# EAGLE board IRis - Master PCB Layout (EAGLE 8.7.0)
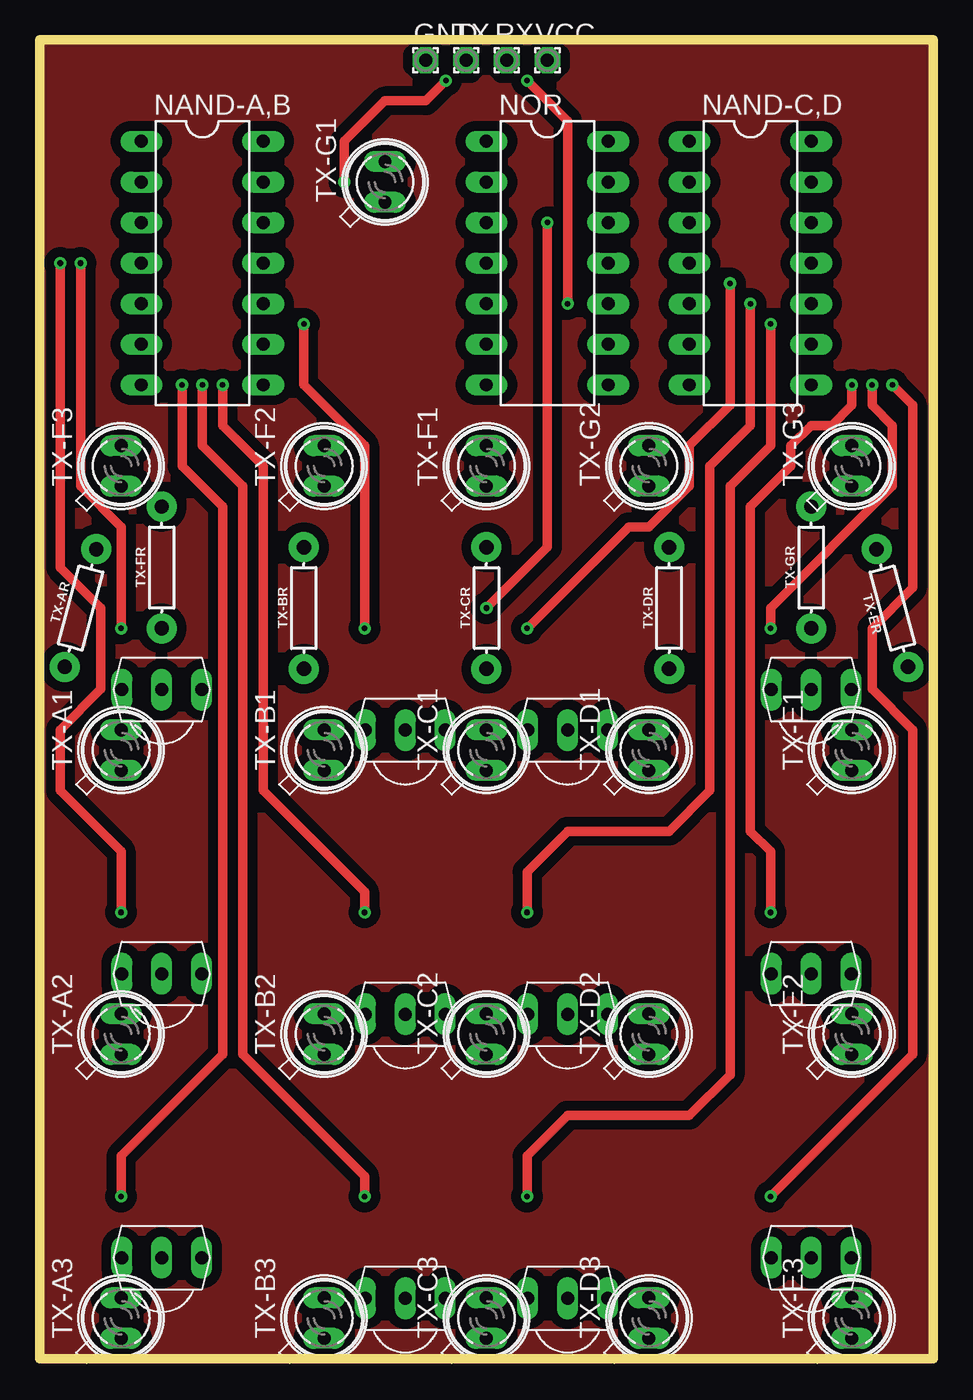
[diagram p0: board, top side]
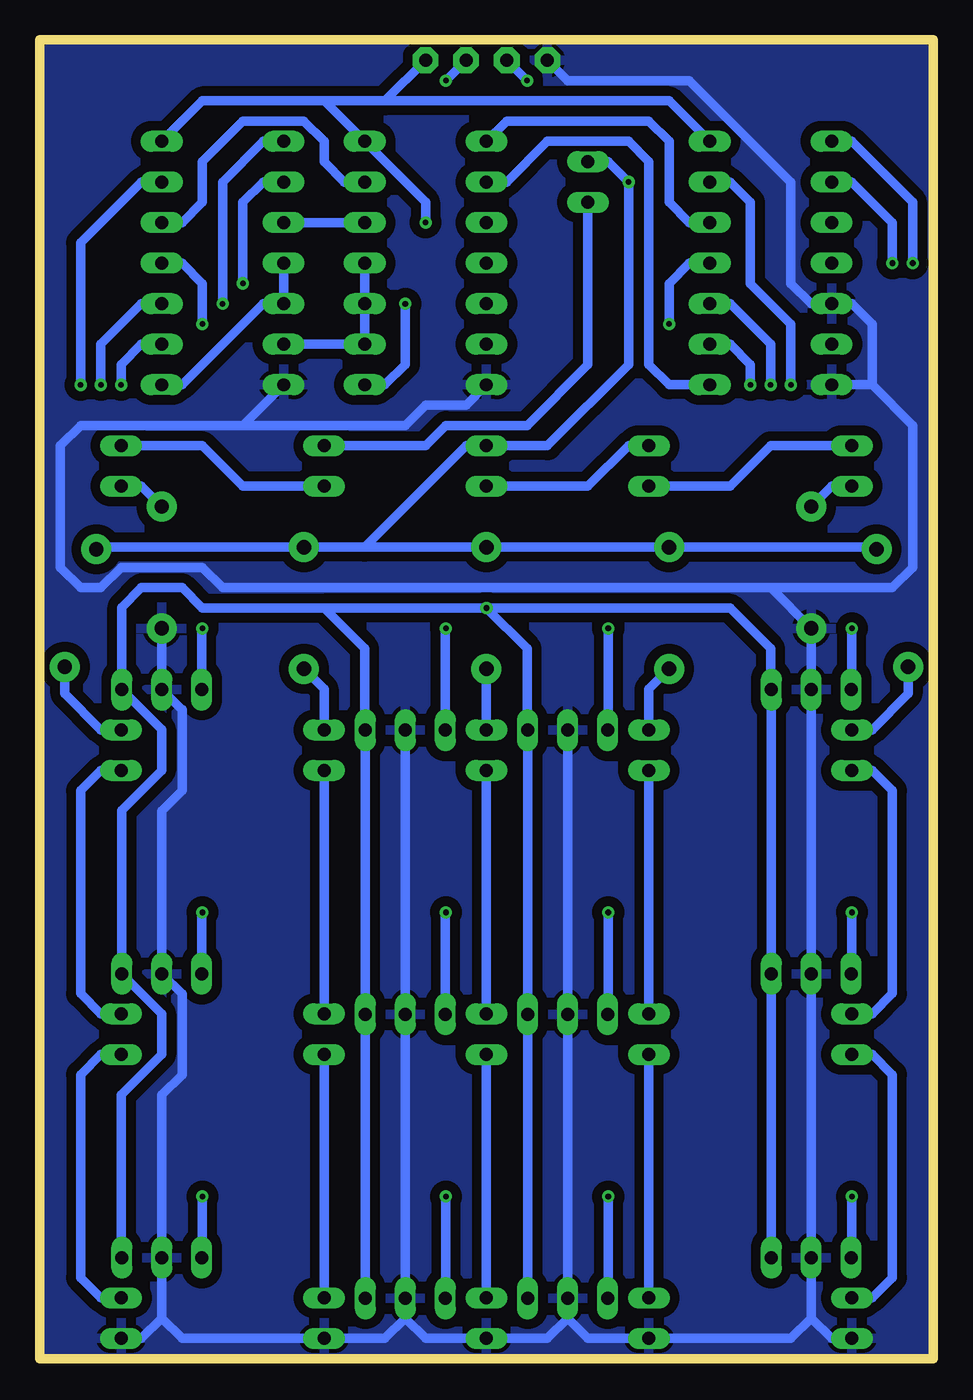
[diagram p1: board, bottom side, seen from below]

Size 55.88 x 82.55 mm. Coordinates in mm from the lower left corner, seen from the top.
Outline: 0,0 55.88,0 55.88,82.55 0,82.55 0,0
Copper layers (1*16): Top 0.035mm / dielectric 1.5mm / Bottom 0.035mm
Design rules "default *": minimum track width 6mil, minimum drill 0.35mm, track to track 6mil, track to pad 6mil, pad to pad 6mil, via to via 6mil, smd to smd 6mil, copper to edge 0mil, drill to drill 6mil, minimum pad ring 10mil, minimum via ring 8mil, stop-mask expansion 4mil, vias tented up to drill 0mil, thermal gap 10mil

## Footprints (pad centres in the part's own frame; a part is rotated, then mirrored left to right if it is on the bottom)
1,6/0,8 = drill 0.813 pad 1.6 octagon: 1 0,0
DIL14 = drill 0.813 long: 1 -7.62,-3.81; 2 -5.08,-3.81; 3 -2.54,-3.81; 4 0,-3.81; 5 2.54,-3.81; 6 5.08,-3.81; 7 7.62,-3.81; 8 7.62,3.81; 9 5.08,3.81; 10 2.54,3.81; 11 0,3.81; 12 -2.54,3.81; 13 -5.08,3.81; 14 -7.62,3.81
TSOP18XX = drill 0.813 long: GND -0.001,-0.027; OUT -2.501,-0.027; VCC 2.499,-0.027
SFH480 = drill 0.813 long: A 1.27,0; K -1.27,0
AXIAL-0.3EZ = drill 0.9 pad 1.88: P$1 -3.81,0; P$2 3.81,0

## Placement (x,y rotation side)
GND  GND  [1,6/0,8]  24.13,81.28 0 top
NAND-A,B  7410  [DIL14]  10.16,68.58 270 top
NAND-C,D  7410  [DIL14]  44.45,68.58 270 top
NOR  7427  [DIL14]  31.75,68.58 270 top
RX  RX  [1,6/0,8]  29.21,81.28 0 top
RX-A1  VS1838B  [TSOP18XX]  7.62,41.91 0 top
RX-A2  VS1838B  [TSOP18XX]  7.62,24.13 0 top
RX-A3  VS1838B  [TSOP18XX]  7.62,6.35 0 top
RX-B1  VS1838B  [TSOP18XX]  22.86,39.37 0 top
RX-B2  VS1838B  [TSOP18XX]  22.86,21.59 0 top
RX-B3  VS1838B  [TSOP18XX]  22.86,3.81 0 top
RX-C1  VS1838B  [TSOP18XX]  33.02,39.37 0 top
RX-C2  VS1838B  [TSOP18XX]  33.02,21.59 0 top
RX-C3  VS1838B  [TSOP18XX]  33.02,3.81 0 top
RX-D1  [TSOP18XX]  48.26,41.91 0 top
RX-D2  [TSOP18XX]  48.26,24.13 0 top
RX-D3  [TSOP18XX]  48.26,6.35 0 top
TX  TX  [1,6/0,8]  26.67,81.28 0 top
TX-A1  IR LED  [SFH480]  5.08,38.1 90 top
TX-A2  [SFH480]  5.08,20.32 90 top
TX-A3  [SFH480]  5.08,2.54 90 top
TX-AR  [AXIAL-0.3EZ]  2.54,46.99 75 top
TX-B1  [SFH480]  17.78,38.1 90 top
TX-B2  [SFH480]  17.78,20.32 90 top
TX-B3  [SFH480]  17.78,2.54 90 top
TX-BR  [AXIAL-0.3EZ]  16.51,46.99 90 top
TX-C1  [SFH480]  27.94,38.1 90 top
TX-C2  [SFH480]  27.94,20.32 90 top
TX-C3  [SFH480]  27.94,2.54 90 top
TX-CR  [AXIAL-0.3EZ]  27.94,46.99 90 top
TX-D1  [SFH480]  38.1,38.1 90 top
TX-D2  [SFH480]  38.1,20.32 90 top
TX-D3  [SFH480]  38.1,2.54 90 top
TX-DR  [AXIAL-0.3EZ]  39.37,46.99 90 top
TX-E1  [SFH480]  50.8,38.1 90 top
TX-E2  [SFH480]  50.8,20.32 90 top
TX-E3  [SFH480]  50.8,2.54 90 top
TX-ER  [AXIAL-0.3EZ]  53.34,46.99 105 top
TX-F1  [SFH480]  27.94,55.88 90 top
TX-F2  [SFH480]  17.78,55.88 90 top
TX-F3  [SFH480]  5.08,55.88 90 top
TX-FR  [AXIAL-0.3EZ]  7.62,49.53 90 top
TX-G1  [SFH480]  21.59,73.66 90 top
TX-G2  [SFH480]  38.1,55.88 90 top
TX-G3  [SFH480]  50.8,55.88 90 top
TX-GR  [AXIAL-0.3EZ]  48.26,49.53 90 top
VCC  VCC  [1,6/0,8]  31.75,81.28 0 top

## Library data of the parts
GND RX TX VCC = wirepad
NAND-A,B NAND-C,D NOR = 40xx
RX-A1-RX-A3 RX-B1-RX-B3 RX-C1-RX-C3 RX-D1-RX-D3 = tsop
TX-A1-TX-A3 TX-B1-TX-B3 TX-C1-TX-C3 TX-D1-TX-D3 TX-E1-TX-E3 TX-F1-TX-F3 TX-G1-TX-G3 = led
TX-AR TX-BR TX-CR TX-DR TX-ER TX-FR TX-GR = SparkFun-Resistors

## Nets
GND: GND.1 NAND-A,B.5 NAND-A,B.7 NAND-C,D.7 NOR.7 RX-A1.GND RX-A2.GND RX-A3.GND RX-B1.GND RX-B2.GND RX-B3.GND RX-C1.GND RX-C2.GND RX-C3.GND RX-D1.GND RX-D2.GND RX-D3.GND TX-A3.K TX-B3.K TX-C3.K TX-D3.K TX-E3.K TX-FR.P$1 TX-GR.P$1
RX: NOR.8 RX.1
S$23: NAND-C,D.4 NAND-C,D.5 NAND-C,D.8
S$25: NAND-C,D.1 RX-C2.OUT
S$26: NAND-C,D.11 RX-C3.OUT
S$27: NAND-C,D.9 RX-D2.OUT
S$29: NAND-C,D.2 RX-C1.OUT
S$32: NAND-C,D.12 NOR.13
S$33: NAND-C,D.3 NOR.12
S$34: NAND-C,D.6 NOR.9 NOR.10 NOR.11
S$35: NAND-A,B.12 NOR.1
S$36: NAND-A,B.8 NOR.2
S$37: NAND-A,B.2 RX-A1.OUT
S$38: NAND-A,B.1 RX-A2.OUT
S$39: NAND-A,B.13 RX-A3.OUT
S$40: NAND-A,B.11 RX-B1.OUT
S$41: NAND-A,B.9 RX-B2.OUT
S$42: NAND-A,B.10 RX-B3.OUT
S$43: NAND-C,D.10 RX-D1.OUT
S$44: NAND-C,D.13 RX-D3.OUT
TX: TX-AR.P$2 TX-BR.P$2 TX-CR.P$2 TX-DR.P$2 TX-ER.P$2 TX-F1.A TX-G1.A TX.1
TX-A1,A2: TX-A1.K TX-A2.A
TX-A2,A3: TX-A2.K TX-A3.A
TX-AR,A1: TX-A1.A TX-AR.P$1
TX-B1,B2: TX-B1.K TX-B2.A
TX-B2,B3: TX-B2.K TX-B3.A
TX-BR,B1: TX-B1.A TX-BR.P$1
TX-C1,C2: TX-C1.K TX-C2.A
TX-C2,C3: TX-C2.K TX-C3.A
TX-CR,C1: TX-C1.A TX-CR.P$1
TX-D1,D2: TX-D1.K TX-D2.A
TX-D2,D3: TX-D2.K TX-D3.A
TX-DR,D1: TX-D1.A TX-DR.P$1
TX-E1,E2: TX-E1.K TX-E2.A
TX-E2,E3: TX-E2.K TX-E3.A
TX-ER,E1: TX-E1.A TX-ER.P$1
TX-F1,F2: TX-F1.K TX-F2.A
TX-F2,F3: TX-F2.K TX-F3.A
TX-F3,FR: TX-F3.K TX-FR.P$2
TX-G1,G2: TX-G1.K TX-G2.A
TX-G2,G3: TX-G2.K TX-G3.A
TX-G3,R: TX-G3.K TX-GR.P$2
VCC: NAND-A,B.14 NAND-C,D.14 NOR.14 RX-A1.VCC RX-A2.VCC RX-A3.VCC RX-B1.VCC RX-B2.VCC RX-B3.VCC RX-C1.VCC RX-C2.VCC RX-C3.VCC RX-D1.VCC RX-D2.VCC RX-D3.VCC VCC.1

## Tracks (layer width: path | path; a pad name or v marks a point on that pad's centre or on a via)
GND
  Bottom 0.61: 7.62,6.35 RX-A2.GND RX-A1.GND 7.62,43.18 TX-FR.P$1 10.16,48.26 | 7.62,6.35 RX-A3.GND | RX-B3.GND | TX-A3.K 6.35,1.27 7.62,2.54 | 7.62,2.54 7.62,6.35 | 7.62,2.54 8.89,1.27 TX-B3.K 21.59,1.27 22.86,2.54 | RX-B3.GND 22.86,2.54 | 22.86,2.54 24.13,1.27 TX-C3.K 31.75,1.27 33.02,2.54 RX-C3.GND | RX-C3.GND 33.02,2.54 34.29,1.27 TX-D3.K 46.99,1.27 48.26,2.54 | 48.26,2.54 RX-D3.GND 48.26,16.51 46.99,17.78 46.99,22.84 RX-D2.GND 48.26,34.29 46.99,35.56 46.99,40.64 47.02,40.64 RX-D1.GND 48.26,44.45 TX-GR.P$1 | 48.26,2.54 49.53,1.27 TX-E3.K | NAND-A,B.7 3.81,60.96 | 3.81,60.96 1.27,58.42 1.27,49.53 2.54,48.26 10.16,48.26 | 3.81,60.96 3.81,64.77 5.08,66.04 NAND-A,B.5 7.62,66.04 8.89,67.31 8.89,73.66 15.24,80.01 22.86,80.01 GND.1 | RX-C1.GND RX-C2.GND RX-C3.GND | RX-B1.GND RX-B2.GND RX-B3.GND | 43.18,58.42 53.34,58.42 54.61,57.15 54.61,49.53 53.34,48.26 52.07,48.26 50.8,49.53 45.72,49.53 44.45,48.26 10.16,48.26 | NAND-C,D.7 43.18,58.42 | 43.18,58.42 33.02,58.42 31.75,59.69 29.21,59.69 NOR.7
  pour Bottom (isolate 0.61): 0,0 55.88,0 55.88,81.28 55.88,82.55 7.62,82.55 0,82.55
RX  (via drill 0.35)
  Top 0.61: v30.48,80.01 33.02,77.47 v33.02,66.04
  Bottom 0.61: RX.1 v30.48,80.01 | v33.02,66.04 33.02,62.23 34.29,60.96 NOR.8
S$1
  pour Top (isolate 0.61): 0,0 55.88,0 55.88,82.55 0,82.55
S$23
  Bottom 0.61: NAND-C,D.8 46.99,60.96 41.91,66.04 NAND-C,D.5 NAND-C,D.4
S$25  (via drill 0.35)
  Top 0.61: v30.48,27.94 30.48,30.48 33.02,33.02 39.37,33.02 41.91,35.56 41.91,55.88 44.45,58.42 v44.45,66.04
  Bottom 0.61: NAND-C,D.1 41.91,76.2 44.45,73.66 v44.45,66.04 | v30.48,27.94 30.52,27.9 RX-C2.OUT
S$26  (via drill 0.35)
  Top 0.61: v30.48,10.16 30.48,12.7 33.02,15.24 40.64,15.24 43.18,17.78 43.18,54.61 45.72,57.15 v45.72,64.77
  Bottom 0.61: NAND-C,D.11 46.99,68.58 45.72,67.31 v45.72,64.77 | v30.48,10.16 30.48,3.82 RX-C3.OUT
S$27  (via drill 0.35)
  Top 0.61: v50.8,60.96 50.8,59.69 49.53,58.42 48.26,58.42 46.99,57.15 46.99,55.88 44.45,53.34 44.45,33.02 45.72,31.75 v45.72,27.94
  Bottom 0.61: NAND-C,D.9 49.53,63.5 50.8,62.23 v50.8,60.96 | RX-D2.OUT 45.76,27.9 v45.72,27.94
S$29  (via drill 0.35)
  Top 0.61: v43.18,67.31 43.18,59.69 40.64,57.15 40.64,54.61 38.1,52.07 36.83,52.07 v30.48,45.72
  Bottom 0.61: NAND-C,D.2 41.91,73.66 43.18,72.39 v43.18,67.31 | RX-C1.OUT 30.52,45.68 v30.48,45.72
S$32
  Bottom 0.61: NAND-C,D.12 46.99,71.12 45.72,72.39 45.72,74.93 43.18,77.47 39.37,77.47 38.1,76.2 38.1,74.93 36.83,73.66 NOR.13
S$33
  Bottom 0.61: NOR.12 NAND-C,D.3
S$34
  Bottom 0.61: NAND-C,D.6 NOR.9 NOR.10 NOR.11
S$35
  Bottom 0.61: NAND-A,B.12 15.24,71.12 16.51,72.39 16.51,76.2 17.78,77.47 26.67,77.47 NOR.1
S$36
  Bottom 0.61: NAND-A,B.8 16.51,60.96 17.78,62.23 17.78,74.93 19.05,76.2 24.13,76.2 26.67,73.66 NOR.2
S$37  (via drill 0.35)
  Top 0.61: v2.54,68.58 2.54,54.61 5.08,52.07 v5.08,45.72
  Bottom 0.61: v2.54,68.58 2.54,71.12 5.08,73.66 NAND-A,B.2 | RX-A1.OUT 5.08,41.92 v5.08,45.72
S$38  (via drill 0.35)
  Top 0.61: v5.08,27.94 5.08,31.75 1.27,35.56 1.27,39.37 3.81,41.91 3.81,46.99 1.27,49.53 v1.27,68.58
  Bottom 0.61: RX-A2.OUT 5.08,24.14 v5.08,27.94 | NAND-A,B.1 5.08,76.2 1.27,72.39 v1.27,68.58
S$39  (via drill 0.35)
  Top 0.61: v5.08,10.16 5.08,12.7 11.43,19.05 11.43,53.34 8.89,55.88 v8.89,60.96
  Bottom 0.61: RX-A3.OUT 5.08,6.36 v5.08,10.16 | NAND-A,B.13 12.7,73.66 11.43,72.39 11.43,67.31 8.89,64.77 v8.89,60.96
S$40  (via drill 0.35)
  Top 0.61: v16.51,64.77 16.51,60.96 20.32,57.15 v20.32,45.72
  Bottom 0.61: v16.51,64.77 16.51,67.31 15.24,68.58 NAND-A,B.11 | v20.32,45.72 20.32,39.38 RX-B1.OUT
S$41  (via drill 0.35)
  Top 0.61: v11.43,60.96 11.43,58.42 13.97,55.88 13.97,35.56 20.32,29.21 v20.32,27.94
  Bottom 0.61: NAND-A,B.9 12.7,63.5 11.43,62.23 v11.43,60.96 | v20.32,27.94 20.32,21.6 RX-B2.OUT
S$42  (via drill 0.35)
  Top 0.61: v10.16,60.96 10.16,57.15 12.7,54.61 12.7,19.05 20.32,11.43 v20.32,10.16
  Bottom 0.61: NAND-A,B.10 12.7,66.04 10.16,63.5 v10.16,60.96 | v20.32,10.16 20.32,3.82 RX-B3.OUT
S$43  (via drill 0.35)
  Top 0.61: v52.07,60.96 52.07,59.69 53.34,58.42 53.34,54.61 45.72,46.99 v45.72,45.72
  Bottom 0.61: v45.72,45.72 45.76,45.68 RX-D1.OUT | NAND-C,D.10 49.53,66.04 52.07,63.5 v52.07,60.96
S$44  (via drill 0.35)
  Top 0.61: v53.34,60.96 54.61,59.69 54.61,48.26 52.07,45.72 52.07,41.91 54.61,39.37 54.61,19.05 v45.72,10.16
  Bottom 0.61: v45.72,10.16 45.72,6.36 RX-D3.OUT | NAND-C,D.13 49.53,73.66 53.34,69.85 v53.34,60.96
TX  (via drill 0.35)
  Top 0.61: v25.4,80.01 24.13,78.74 21.59,78.74 19.05,76.2 v19.05,73.66
  Bottom 0.61: TX-DR.P$2 35.56,50.8 29.21,57.15 TX-F1.A 24.13,57.15 19.05,62.23 v19.05,73.66 20.32,74.93 TX-G1.A | TX-DR.P$2 TX-CR.P$2 TX-BR.P$2 3.81,50.8 3.68,50.67 TX-AR.P$2 | TX-DR.P$2 52.22,50.8 TX-ER.P$2 | TX.1 v25.4,80.01
TX-A1,A2
  Bottom 0.61: TX-A2.A 3.81,21.59 2.54,22.86 2.54,35.56 3.81,36.83 TX-A1.K
TX-A2,A3
  Bottom 0.61: TX-A2.K 3.81,19.05 2.54,17.78 2.54,5.08 3.81,3.81 TX-A3.A
TX-AR,A1
  Bottom 0.61: TX-AR.P$1 1.55,41.63 3.81,39.37 TX-A1.A
TX-B1,B2
  Bottom 0.61: TX-B1.K TX-B2.A
TX-B2,B3
  Bottom 0.61: TX-B2.K TX-B3.A
TX-BR,B1
  Bottom 0.61: TX-BR.P$1 17.78,41.91 TX-B1.A
TX-C1,C2
  Bottom 0.61: TX-C1.K TX-C2.A
TX-C2,C3
  Bottom 0.61: TX-C2.K TX-C3.A
TX-CR,C1
  Bottom 0.61: TX-CR.P$1 TX-C1.A
TX-D1,D2
  Bottom 0.61: TX-D1.K TX-D2.A
TX-D2,D3
  Bottom 0.61: TX-D2.K TX-D3.A
TX-DR,D1
  Bottom 0.61: TX-DR.P$1 38.1,41.91 TX-D1.A
TX-E1,E2
  Bottom 0.61: TX-E1.K 52.07,36.83 53.34,35.56 53.34,22.86 52.07,21.59 TX-E2.A
TX-E2,E3
  Bottom 0.61: TX-E2.K 52.07,19.05 53.34,17.78 53.34,5.08 52.07,3.81 TX-E3.A
TX-ER,E1
  Bottom 0.61: TX-E1.A 52.07,39.37 54.33,41.63 TX-ER.P$1
TX-F1,F2
  Bottom 0.61: TX-F1.K 21.59,54.61 19.05,57.15 TX-F2.A
TX-F2,F3
  Bottom 0.61: TX-F2.K 12.7,54.61 10.16,57.15 TX-F3.A
TX-F3,FR
  Bottom 0.61: TX-F3.K 6.35,54.61 TX-FR.P$2
TX-G1,G2
  Bottom 0.61: TX-G2.A 31.75,57.15 30.48,58.42 25.4,58.42 21.59,62.23 TX-G1.K
TX-G2,G3
  Bottom 0.61: TX-G2.K 43.18,54.61 45.72,57.15 TX-G3.A
TX-G3,R
  Bottom 0.61: TX-G3.K 49.53,54.61 TX-GR.P$2
VCC  (via drill 0.35)
  Top 0.61: v31.75,71.12 31.75,50.8 v27.94,46.99
  Bottom 0.61: RX-A3.VCC RX-A2.VCC RX-A1.VCC 10.16,41.92 10.16,44.45 12.7,46.99 v27.94,46.99 | RX-B3.VCC RX-B2.VCC RX-B1.VCC 25.4,39.38 25.4,44.45 v27.94,46.99 | 38.1,46.99 35.56,44.45 35.56,39.38 RX-C1.VCC RX-C2.VCC RX-C3.VCC | v27.94,46.99 38.1,46.99 | RX-D1.VCC 50.8,41.92 | RX-D1.VCC 48.26,39.38 48.26,36.83 50.76,34.33 RX-D2.VCC 50.76,24.09 48.26,21.59 48.26,19.05 50.8,16.51 50.8,6.37 RX-D3.VCC | RX-D1.VCC 50.76,47.03 49.53,48.26 46.99,48.26 45.72,46.99 38.1,46.99 | NAND-A,B.14 16.51,78.74 34.29,78.74 | NAND-C,D.14 45.72,78.74 38.1,78.74 | VCC.1 34.29,78.74 | 34.29,78.74 38.1,78.74 | 38.1,78.74 NOR.14 31.75,72.39 v31.75,71.12